# Altium PCB ROS_CAR.PcbDoc (part 8 of 13)
Units mil, origin at the board's own origin, x right, y up, seen from the top; angles counter-clockwise.
Board outline 3937.01 x 3937.01 mil, 2 copper layers (Top Layer, Bottom Layer); 201 components, 155 nets, 998 pads, 0 vias.
Unrouted connection lines stored in the file: 3.
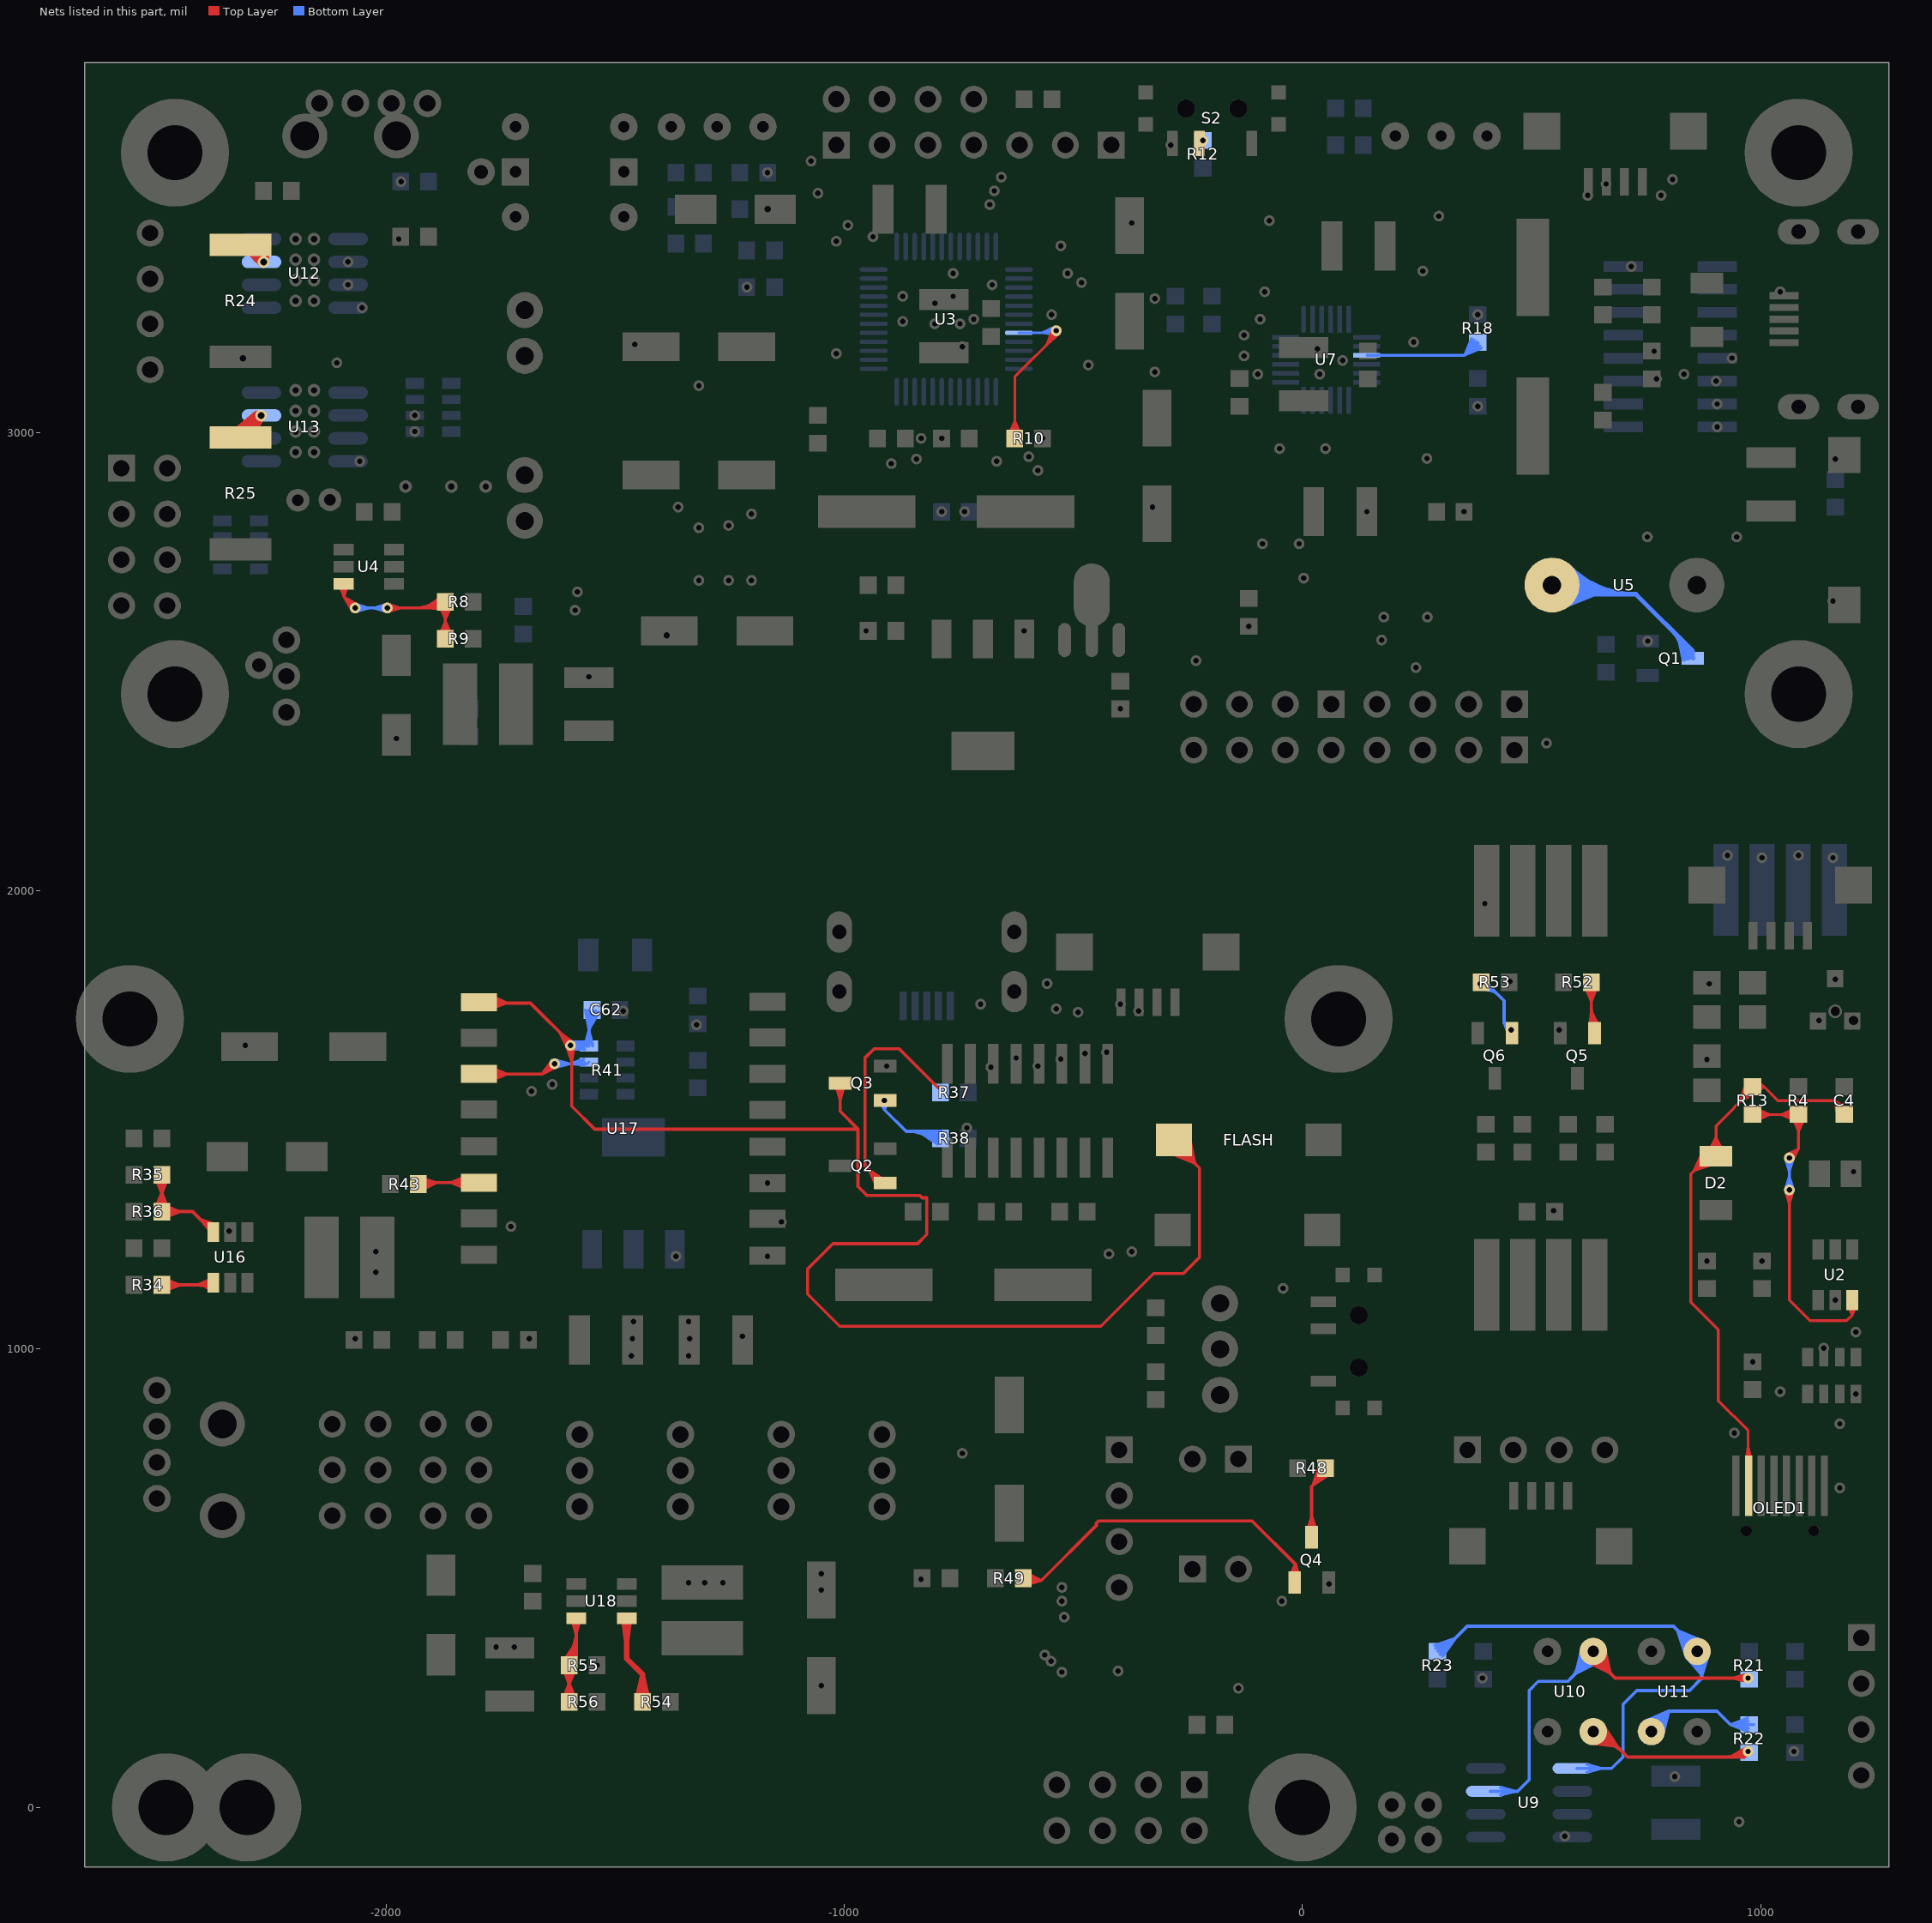
[diagram p8: the nets of this part, all layers, seen from the top]

## Nets (pads, with @x,y where several pads share a name; then routed paths per layer and width w, separated by ;. In a path a pad name is that pad's centre, name@x,y a point inside that pad or via, vN(x,y) a via of type N, cw(c..) or ccw(c..) an arc to the next point about the centre after c; other vN are vias at no path point) (continued)
NetQ1_C: Q1.3 U5.2 | length 5338.2
  Bottom Layer w10: U5.2@537.52,2672.09 562.52,2647.09 727.52,2647.09 851.73,2522.87 Q1.3@851.73,2507.09 ; U5.2@542.5,2642.17 636.62,2647.09 ; U5.2@542.51,2652.22 636.62,2647.09 ; U5.2@543.57,2632.1 636.62,2647.09 ; U5.2@545.74,2622.1 636.62,2647.09 ; U5.2@548.06,2670.62 ccw(c604.88,2727.44) 604.88,2647.09 ccw(c604.88,2606.73) U5.2@576.34,2635.27 ; U5.2@548.86,2681.45 636.62,2647.09 ; U5.2@549.04,2612.27 636.62,2647.09 ; U5.2@553.02,2690.6 636.62,2647.09 ; U5.2@555.13,2677.69 ccw(c629.02,2751.58) 629.02,2647.09 ccw(c629.02,2582.59) U5.2@583.41,2628.2 ; U5.2@558.17,2699.32 636.62,2647.09 ; U5.2@562.2,2684.76 ccw(c653.16,2775.73) 653.16,2647.09 ; U5.2@564.29,2707.51 636.62,2647.09 ; U5.2@569.27,2691.84 ccw(c677.3,2799.87) 677.3,2647.09 ; U5.2@571.37,2715.09 636.62,2647.09 ; U5.2@576.34,2698.91 ccw(c701.44,2824.01) 701.44,2647.09 ; U5.2@583.41,2705.98 ccw(c725.59,2848.15) 725.59,2647.09 ; Q1.3@832.42,2504.85 826.15,2545.91 ; Q1.3@832.47,2504.67 825.31,2545.6 ; Q1.3@848.65,2511.22 825.31,2545.6 ; Q1.3@848.74,2511.06 826.15,2545.91 ; 807.1,2567.51 cw(c746.68,2507.09) Q1.3@832.13,2507.09 ; 807.1,2567.51 cw(c746.68,2507.09) Q1.3@832.13,2507.09 ; 807.1,2567.51 cw(c746.68,2507.09) Q1.3@832.13,2507.09 ; 821.76,2552.85 Q1.3@840.91,2507.09 ; 821.76,2552.85 Q1.3@848.67,2511.18 ; 821.76,2552.85 Q1.3@832.54,2504.43 ; 821.76,2552.85 Q1.3@840.91,2507.09 ; 821.76,2552.85 Q1.3@848.67,2511.18 ; 821.76,2552.85 Q1.3@832.54,2504.43 ; 821.76,2552.85 Q1.3@840.91,2507.09 ; 821.76,2552.85 Q1.3@848.67,2511.18 ; 821.76,2552.85 Q1.3@832.54,2504.43 ; 821.82,2552.56 Q1.3@840.91,2507.09 ; 821.82,2552.56 Q1.3@848.67,2511.19 ; 821.82,2552.56 Q1.3@832.54,2504.42 ; 821.82,2552.58 Q1.3@840.91,2507.09 ; 821.82,2552.58 Q1.3@848.67,2511.19 ; 821.82,2552.58 Q1.3@832.54,2504.42 ; 821.82,2552.58 Q1.3@840.91,2507.09 ; 821.82,2552.58 Q1.3@848.67,2511.19 ; 821.82,2552.58 Q1.3@832.54,2504.42 ; 821.82,2552.58 Q1.3@840.91,2507.09 ; 821.82,2552.58 Q1.3@848.67,2511.19 ; 821.82,2552.58 Q1.3@832.54,2504.42 ; 823.92,2547.56 Q1.3@840.91,2507.09 ; 823.92,2547.56 Q1.3@848.62,2511.28 ; 823.92,2547.56 Q1.3@832.51,2504.52 ; 823.98,2547.54 Q1.3@840.91,2507.09 ; 823.98,2547.54 Q1.3@848.62,2511.27 ; 823.98,2547.54 Q1.3@832.51,2504.53 ; 823.96,2547.58 Q1.3@840.91,2507.09 ; 823.96,2547.58 Q1.3@848.63,2511.27 ; 823.96,2547.58 Q1.3@832.51,2504.52 ; 823.96,2547.58 Q1.3@840.91,2507.09 ; 823.96,2547.58 Q1.3@848.63,2511.27 ; 823.96,2547.58 Q1.3@832.51,2504.52 ; 823.96,2547.58 Q1.3@840.91,2507.09 ; 823.96,2547.58 Q1.3@848.63,2511.27 ; 823.96,2547.58 Q1.3@832.51,2504.52 ; 823.96,2547.58 Q1.3@840.91,2507.09 ; 823.96,2547.58 Q1.3@848.63,2511.27 ; 823.96,2547.58 Q1.3@832.51,2504.52 ; 824.17,2550.44 cw(c780.82,2507.09) Q1.3@842.13,2507.09 ; 824.17,2550.44 cw(c780.82,2507.09) Q1.3@842.13,2507.09 ; 824.17,2550.44 cw(c780.82,2507.09) Q1.3@842.13,2507.09 ; 825.31,2545.6 Q1.3@840.91,2507.09 ; 826.15,2545.91 Q1.3@840.91,2507.09 ; 826.22,2545.94 Q1.3@840.91,2507.09 ; 826.22,2545.94 Q1.3@848.74,2511.04 ; 826.22,2545.94 Q1.3@832.41,2504.87 ; 826.22,2545.94 Q1.3@840.91,2507.09 ; 826.22,2545.94 Q1.3@848.74,2511.04 ; 826.22,2545.94 Q1.3@832.41,2504.87 ; 826.22,2545.94 Q1.3@840.91,2507.09 ; 826.22,2545.94 Q1.3@848.74,2511.04 ; 826.22,2545.94 Q1.3@832.41,2504.87 ; 826.22,2545.94 Q1.3@840.91,2507.09 ; 826.22,2545.94 Q1.3@848.74,2511.04 ; 826.22,2545.94 Q1.3@832.41,2504.87 ; 826.22,2545.94 Q1.3@840.91,2507.09 ; 826.22,2545.94 Q1.3@848.74,2511.04 ; 826.22,2545.94 Q1.3@832.41,2504.87 ; 826.22,2545.94 Q1.3@840.91,2507.09 ; 826.22,2545.94 Q1.3@848.74,2511.04 ; 826.22,2545.94 Q1.3@832.41,2504.87 ; 841.24,2533.37 cw(c814.96,2507.09) Q1.3@852.13,2507.09 ; 841.24,2533.37 cw(c814.96,2507.09) Q1.3@852.13,2507.09 ; 841.24,2533.37 cw(c814.96,2507.09) Q1.3@852.13,2507.09
NetQ2_B: Q2.1 R37.2 | length 2861.7
  Top Layer w7: Q2.1@-910.79,1362.6 -917.6,1362.6 -955,1400 -955,1635 -935,1655 -880,1655 -795,1570 ; -944.27,1389.27 Q2.1@-921.61,1362.6 ; -944.27,1389.27 Q2.1@-914.84,1370.33 ; -944.27,1389.27 Q2.1@-930.34,1357.17 ; -944.27,1389.27 Q2.1@-921.61,1362.6 ; -944.27,1389.27 Q2.1@-914.84,1370.33 ; -944.27,1389.27 Q2.1@-930.34,1357.17 ; -944.27,1389.27 Q2.1@-921.61,1362.6 ; -944.27,1389.27 Q2.1@-914.84,1370.33 ; -944.27,1389.27 Q2.1@-930.34,1357.17 ; -944.27,1389.27 Q2.1@-921.61,1362.6 ; -944.27,1389.27 Q2.1@-914.84,1370.33 ; -944.27,1389.27 Q2.1@-930.34,1357.17 ; -944.27,1389.27 Q2.1@-921.61,1362.6 ; -944.27,1389.27 Q2.1@-914.84,1370.33 ; -944.27,1389.27 Q2.1@-930.34,1357.17 ; -944.27,1389.27 Q2.1@-921.61,1362.6 ; -944.27,1389.27 Q2.1@-914.84,1370.33 ; -944.27,1389.27 Q2.1@-930.34,1357.17 ; -944.27,1389.27 Q2.1@-921.61,1362.6 ; -944.27,1389.27 Q2.1@-914.84,1370.33 ; -944.27,1389.27 Q2.1@-930.34,1357.17 ; -944.27,1389.27 Q2.1@-921.61,1362.6 ; -944.27,1389.27 Q2.1@-914.84,1370.33 ; -944.27,1389.27 Q2.1@-930.34,1357.17 ; -944.27,1389.27 Q2.1@-921.61,1362.6 ; -944.27,1389.27 Q2.1@-914.84,1370.33 ; -944.27,1389.27 Q2.1@-930.34,1357.17 ; -944.27,1389.27 Q2.1@-921.61,1362.6 ; -944.27,1389.27 Q2.1@-914.84,1370.33 ; -944.27,1389.27 Q2.1@-930.34,1357.17 ; -944.27,1389.27 Q2.1@-921.61,1362.6 ; -944.27,1389.27 Q2.1@-914.84,1370.33 ; -944.27,1389.27 Q2.1@-930.34,1357.17 ; -944.27,1389.27 Q2.1@-921.61,1362.6 ; -944.27,1389.27 Q2.1@-914.84,1370.33 ; -944.27,1389.27 Q2.1@-930.34,1357.17 ; -944.27,1389.27 Q2.1@-921.61,1362.6 ; -944.27,1389.27 Q2.1@-914.84,1370.33 ; -944.27,1389.27 Q2.1@-930.34,1357.17 ; -944.27,1389.27 Q2.1@-921.61,1362.6 ; -944.27,1389.27 Q2.1@-914.84,1370.33 ; -944.27,1389.27 Q2.1@-930.34,1357.17 ; -944.27,1389.27 Q2.1@-921.61,1362.6 ; -944.27,1389.27 Q2.1@-914.84,1370.33 ; -944.27,1389.27 Q2.1@-930.34,1357.17 ; -944.27,1389.27 Q2.1@-921.61,1362.6 ; -944.27,1389.27 Q2.1@-914.84,1370.33 ; -944.27,1389.27 Q2.1@-930.34,1357.17 ; -944.27,1389.27 Q2.1@-921.61,1362.6 ; -944.27,1389.27 Q2.1@-914.84,1370.33 ; -944.27,1389.27 Q2.1@-930.34,1357.17 ; -944.27,1389.27 Q2.1@-921.61,1362.6 ; -944.27,1389.27 Q2.1@-914.84,1370.33 ; -944.27,1389.27 Q2.1@-930.34,1357.17 ; -944.27,1389.27 Q2.1@-921.61,1362.6 ; -944.27,1389.27 Q2.1@-914.84,1370.33 ; -944.27,1389.27 Q2.1@-930.34,1357.17 ; -944.27,1389.27 Q2.1@-921.61,1362.6 ; -944.27,1389.27 Q2.1@-914.84,1370.33 ; -944.27,1389.27 Q2.1@-930.34,1357.17 ; -944.27,1389.27 Q2.1@-921.61,1362.6 ; -944.27,1389.27 Q2.1@-914.84,1370.33 ; -944.27,1389.27 Q2.1@-930.34,1357.17 ; -942,1387 cw(c-966.41,1362.6) Q2.1@-931.89,1362.6 ; -942,1387 cw(c-966.41,1362.6) Q2.1@-931.89,1362.6 ; -942,1387 cw(c-966.41,1362.6) Q2.1@-931.89,1362.6 ; -932.31,1377.31 ccw(c-921.61,1388) Q2.1@-921.61,1372.88 ; -932.31,1377.31 ccw(c-921.61,1388) Q2.1@-921.61,1372.88 ; -932.31,1377.31 ccw(c-921.61,1388) Q2.1@-921.61,1372.88 ; Q2.1@-930.05,1375.05 cw(c-942.51,1362.6) Q2.1@-924.89,1362.6 ; Q2.1@-930.05,1375.05 cw(c-942.51,1362.6) Q2.1@-924.89,1362.6 ; Q2.1@-930.05,1375.05 cw(c-942.51,1362.6) Q2.1@-924.89,1362.6
NetQ3_B: pad.1@-912.5,1542.5 Q3.1 R38.2 | length 691.5
  Bottom Layer w7: pad.1@-920.63,1540.77 -912.5,1522.5 ; pad.1@-918.36,1536.61 cw(c-932.41,1522.5) -912.5,1522.5 ; pad.1@-906.64,1536.61 ccw(c-892.59,1522.5) -912.5,1522.5 ; pad.1@-904.37,1540.77 -912.5,1522.5 ; -859.9,1475 cw(c-859.9,1391.4) R38.2@-800.79,1450.51 ; -843,1475 cw(c-843,1408.3) R38.2@-795.84,1455.46 ; -826.1,1475 cw(c-826.1,1425.2) R38.2@-790.89,1460.41 ; -809.2,1475 cw(c-809.2,1442.1) R38.2@-785.94,1465.36 ; R38.2@-796.55,1447.55 -838.11,1475 ; R38.2@-793.09,1453.69 -838.11,1475 ; R38.2@-790.32,1460 -805.32,1475 -865,1475 -912.5,1522.5 ; R38.2@-790.32,1460.98 -838.11,1475 ; R38.2@-788.71,1468.62 -838.11,1475 ; R38.2@-788.31,1475.65 -838.11,1475 ; -912.5,1522.5 pad.1@-912.5,1542.5 -912.5,1522.5
NetQ4_B: Q4.1 R49.1 | length 2905
  Top Layer w7: R49.1@-610,495 -570,495 ; R49.1@-609.71,491.21 -570.18,495 ; R49.1@-609.69,499.02 -570.18,495 ; R49.1@-608.41,484.26 -570.18,495 ; R49.1@-608.14,506.67 -570.18,495 ; R49.1@-605.47,513.21 -570.18,495 ; R49.1@-603.64,503.96 ccw(c-584.76,519.38) -584.76,495 ; R49.1@-599.21,488.55 cw(c-583.63,472.96) -583.63,495 ; R49.1@-598.22,508.38 ccw(c-570,531.43) -570,495 ; Q4.1@-17.4,490.79 -15,493.19 -15,530 ; -570,495 -450,615 -450,620 -445,625 -110,625 -15,530 ; Q4.1@-27.32,504.31 -15,530 ; Q4.1@-27.32,504.31 -15,530 ; Q4.1@-27.32,504.31 -15,530 ; Q4.1@-27.32,504.31 -15,530 ; Q4.1@-27.32,504.31 -15,530 ; Q4.1@-27.32,504.31 -15,530 ; Q4.1@-27.32,504.31 -15,530 ; Q4.1@-27.32,504.31 -15,530 ; Q4.1@-27.32,504.31 -15,530 ; Q4.1@-27.32,504.31 -15,530 ; Q4.1@-27.32,504.31 -15,530 ; Q4.1@-27.32,504.31 -15,530 ; Q4.1@-27.32,504.31 -15,530 ; Q4.1@-27.32,504.31 -15,530 ; Q4.1@-27.32,504.31 -15,530 ; Q4.1@-27.32,504.31 -15,530 ; Q4.1@-27.32,504.31 -15,530 ; Q4.1@-27.32,504.31 -15,530 ; Q4.1@-27.32,504.31 -15,530 ; Q4.1@-27.32,504.31 -15,530 ; Q4.1@-27.32,504.31 -15,530 ; Q4.1@-24.26,509.27 ccw(c-42.83,530) -15,530 ; Q4.1@-24.26,509.27 ccw(c-42.83,530) -15,530 ; Q4.1@-24.26,509.27 ccw(c-42.83,530) -15,530 ; Q4.1@-17.4,501.61 -15,530 ; Q4.1@-17.4,501.61 -15,530 ; Q4.1@-17.4,501.61 -15,530 ; Q4.1@-17.4,501.61 -15,530 ; Q4.1@-17.4,501.61 -15,530 ; Q4.1@-17.4,501.61 -15,530 ; Q4.1@-17.4,501.61 -15,530 ; Q4.1@-17.4,501.61 -15,530 ; Q4.1@-17.4,501.61 -15,530 ; Q4.1@-17.4,501.61 -15,530 ; Q4.1@-17.4,501.61 -15,530 ; Q4.1@-17.4,501.61 -15,530 ; Q4.1@-17.4,501.61 -15,530 ; Q4.1@-17.4,501.61 -15,530 ; Q4.1@-17.4,501.61 -15,530 ; Q4.1@-17.4,501.61 -15,530 ; Q4.1@-17.4,501.61 -15,530 ; Q4.1@-17.4,501.61 -15,530 ; Q4.1@-17.4,501.61 -15,530 ; Q4.1@-17.4,501.61 -15,530 ; Q4.1@-17.4,501.61 -15,530 ; -15,520.63 ccw(c1.62,520.63) Q4.1@-10.13,508.88 ; -15,520.63 ccw(c1.62,520.63) Q4.1@-10.13,508.88 ; -15,520.63 ccw(c1.62,520.63) Q4.1@-10.13,508.88 ; -15,530 Q4.1@-7.17,502.61 ; -15,530 Q4.1@-7.17,502.61 ; -15,530 Q4.1@-7.17,502.61 ; -15,530 Q4.1@-7.17,502.61 ; -15,530 Q4.1@-7.17,502.61 ; -15,530 Q4.1@-7.17,502.61 ; -15,530 Q4.1@-7.17,502.61 ; -15,530 Q4.1@-7.17,502.61 ; -15,530 Q4.1@-7.17,502.61 ; -15,530 Q4.1@-7.17,502.61 ; -15,530 Q4.1@-7.17,502.61 ; -15,530 Q4.1@-7.17,502.61 ; -15,530 Q4.1@-7.17,502.61 ; -15,530 Q4.1@-7.17,502.61 ; -15,530 Q4.1@-7.17,502.61 ; -15,530 Q4.1@-7.17,502.61 ; -15,530 Q4.1@-7.17,502.61 ; -15,530 Q4.1@-7.17,502.61 ; -15,530 Q4.1@-7.17,502.61 ; -15,530 Q4.1@-7.17,502.61 ; -15,530 Q4.1@-7.17,502.61
NetQ4_C: Q4.3 R48.2 | length 2773.3
  Top Layer w7: Q4.3@20,589.21 20,700 R48.2@60,740 ; 24.35,704.35 ccw(c-3.59,732.29) R48.2@35.62,737.18 ; 34.48,714.48 ccw(c14.41,734.54) R48.2@42.57,738.05 ; R48.2@37.2,745.88 23.21,703.21 ; 39.89,719.89 cw(c50.32,709.47) R48.2@50.32,724.21 ; R48.2@43.7,743.17 23.21,703.21 ; R48.2@50.32,739.02 23.21,703.21 ; R48.2@56.11,733.78 23.21,703.21 ; R48.2@60.49,728.25 23.21,703.21 ; Q4.3@9.83,601.56 20,634.82 ; Q4.3@9.83,601.56 20,634.82 ; Q4.3@9.83,601.56 20,634.82 ; Q4.3@9.83,601.56 20,634.82 ; Q4.3@9.83,601.56 20,634.82 ; Q4.3@9.83,601.56 20,634.82 ; Q4.3@9.83,601.56 20,634.82 ; Q4.3@9.83,601.56 20,634.82 ; Q4.3@9.83,601.56 20,634.82 ; Q4.3@9.83,601.56 20,634.82 ; Q4.3@9.83,601.56 20,634.82 ; Q4.3@9.83,601.56 20,634.82 ; Q4.3@9.83,601.56 20,634.82 ; Q4.3@9.83,601.56 20,634.82 ; Q4.3@9.83,601.56 20,634.82 ; Q4.3@9.83,601.56 20,634.82 ; Q4.3@9.83,601.56 20,634.82 ; Q4.3@9.83,601.56 20,634.82 ; Q4.3@9.83,601.56 20,634.82 ; Q4.3@9.83,601.56 20,634.82 ; Q4.3@9.83,601.56 20,634.82 ; Q4.3@12.73,607.31 ccw(c-4.82,624.86) 20,624.86 ; Q4.3@12.73,607.31 ccw(c-4.82,624.86) 20,624.86 ; Q4.3@12.73,607.31 ccw(c-4.82,624.86) 20,624.86 ; Q4.3@20,600.04 20,634.82 ; Q4.3@20,600.04 20,634.82 ; Q4.3@20,600.04 20,634.82 ; Q4.3@20,600.04 20,634.82 ; Q4.3@20,600.04 20,634.82 ; Q4.3@20,600.04 20,634.82 ; Q4.3@20,600.04 20,634.82 ; Q4.3@20,600.04 20,634.82 ; Q4.3@20,600.04 20,634.82 ; Q4.3@20,600.04 20,634.82 ; Q4.3@20,600.04 20,634.82 ; Q4.3@20,600.04 20,634.82 ; Q4.3@20,600.04 20,634.82 ; Q4.3@20,600.04 20,634.82 ; Q4.3@20,600.04 20,634.82 ; Q4.3@20,600.04 20,634.82 ; Q4.3@20,600.04 20,634.82 ; Q4.3@20,600.04 20,634.82 ; Q4.3@20,600.04 20,634.82 ; Q4.3@20,600.04 20,634.82 ; Q4.3@20,600.04 20,634.82 ; 20,624.86 ccw(c44.82,624.86) Q4.3@27.27,607.31 ; 20,624.86 ccw(c44.82,624.86) Q4.3@27.27,607.31 ; 20,624.86 ccw(c44.82,624.86) Q4.3@27.27,607.31 ; 20,634.82 Q4.3@30.17,601.56 ; 20,634.82 Q4.3@30.17,601.56 ; 20,634.82 Q4.3@30.17,601.56 ; 20,634.82 Q4.3@30.17,601.56 ; 20,634.82 Q4.3@30.17,601.56 ; 20,634.82 Q4.3@30.17,601.56 ; 20,634.82 Q4.3@30.17,601.56 ; 20,634.82 Q4.3@30.17,601.56 ; 20,634.82 Q4.3@30.17,601.56 ; 20,634.82 Q4.3@30.17,601.56 ; 20,634.82 Q4.3@30.17,601.56 ; 20,634.82 Q4.3@30.17,601.56 ; 20,634.82 Q4.3@30.17,601.56 ; 20,634.82 Q4.3@30.17,601.56 ; 20,634.82 Q4.3@30.17,601.56 ; 20,634.82 Q4.3@30.17,601.56 ; 20,634.82 Q4.3@30.17,601.56 ; 20,634.82 Q4.3@30.17,601.56 ; 20,634.82 Q4.3@30.17,601.56 ; 20,634.82 Q4.3@30.17,601.56 ; 20,634.82 Q4.3@30.17,601.56
NetQ5_B: Q5.1 R52.1 | length 2850.5
  Top Layer w7: R52.1@615.77,1796.23 630.31,1759.71 ; R52.1@619.84,1788.55 cw(c594.57,1763.27) 630.31,1763.27 cw(c666.06,1763.27) R52.1@640.79,1788.55 ; R52.1@622.55,1798.24 630.31,1759.71 ; R52.1@624.79,1793.5 cw(c611.47,1780.17) 630.31,1780.17 cw(c649.16,1780.17) R52.1@635.84,1793.5 ; R52.1@630.31,1799.02 630.31,1759.71 ; R52.1@630.31,1800 630.31,1696.3 Q5.1@637.4,1689.21 ; R52.1@638.08,1798.24 630.31,1759.71 ; R52.1@644.86,1796.23 630.31,1759.71 ; Q5.1@627.14,1699.48 630.31,1735.67 ; Q5.1@627.14,1699.48 630.31,1735.67 ; Q5.1@627.14,1699.48 630.31,1735.67 ; Q5.1@627.14,1699.48 630.31,1735.67 ; Q5.1@627.14,1699.48 630.31,1735.67 ; Q5.1@627.14,1699.48 630.31,1735.67 ; Q5.1@627.14,1699.48 630.31,1735.67 ; Q5.1@627.14,1699.48 630.31,1735.67 ; Q5.1@627.14,1699.48 630.31,1735.67 ; Q5.1@627.14,1699.48 630.31,1735.67 ; Q5.1@627.14,1699.48 630.31,1735.67 ; Q5.1@627.14,1699.48 630.31,1735.67 ; Q5.1@627.14,1699.48 630.31,1735.67 ; Q5.1@627.13,1699.52 630.52,1734.64 ; Q5.1@627.13,1699.52 630.52,1734.64 ; Q5.1@627.13,1699.52 630.52,1734.64 ; Q5.1@627.13,1699.52 630.52,1734.64 ; Q5.1@627.13,1699.52 630.52,1734.64 ; Q5.1@627.13,1699.52 630.52,1734.64 ; Q5.1@627.13,1699.52 630.52,1734.64 ; Q5.1@627.13,1699.52 630.52,1734.64 ; 630.31,1725.07 ccw(c662.43,1725.07) Q5.1@639.72,1702.36 ; 630.31,1725.07 ccw(c662.43,1725.07) Q5.1@639.72,1702.36 ; 630.31,1725.07 ccw(c662.43,1725.07) Q5.1@639.72,1702.36 ; 630.31,1735.67 Q5.1@637.4,1700.04 ; 630.31,1735.67 Q5.1@647.1,1703.45 ; 630.31,1735.67 Q5.1@637.4,1700.04 ; 630.31,1735.67 Q5.1@647.1,1703.45 ; 630.31,1735.67 Q5.1@637.4,1700.04 ; 630.31,1735.67 Q5.1@647.1,1703.45 ; 630.31,1735.67 Q5.1@637.4,1700.04 ; 630.31,1735.67 Q5.1@647.1,1703.45 ; 630.31,1735.67 Q5.1@637.4,1700.04 ; 630.31,1735.67 Q5.1@647.1,1703.45 ; 630.31,1735.67 Q5.1@637.4,1700.04 ; 630.31,1735.67 Q5.1@647.1,1703.45 ; 630.31,1735.67 Q5.1@637.4,1700.04 ; 630.31,1735.67 Q5.1@647.1,1703.45 ; 630.31,1735.67 Q5.1@637.4,1700.04 ; 630.31,1735.67 Q5.1@647.1,1703.45 ; 630.31,1735.67 Q5.1@637.4,1700.04 ; 630.31,1735.67 Q5.1@647.1,1703.45 ; 630.31,1735.67 Q5.1@637.4,1700.04 ; 630.31,1735.67 Q5.1@647.1,1703.45 ; 630.31,1735.67 Q5.1@637.4,1700.04 ; 630.31,1735.67 Q5.1@647.1,1703.45 ; 630.31,1735.67 Q5.1@637.4,1700.04 ; 630.31,1735.67 Q5.1@647.1,1703.45 ; 630.31,1735.67 Q5.1@637.4,1700.04 ; 630.31,1735.67 Q5.1@647.1,1703.45 ; 630.31,1741.96 ccw(c679.33,1741.96) Q5.1@644.67,1707.31 ; 630.31,1741.96 ccw(c679.33,1741.96) Q5.1@644.67,1707.31 ; 630.31,1741.96 ccw(c679.33,1741.96) Q5.1@644.67,1707.31 ; 630.52,1734.64 Q5.1@637.4,1700.04 ; 630.52,1734.64 Q5.1@647.08,1703.49 ; 630.52,1734.64 Q5.1@637.4,1700.04 ; 630.52,1734.64 Q5.1@647.08,1703.49 ; 630.52,1734.64 Q5.1@637.4,1700.04 ; 630.52,1734.64 Q5.1@647.08,1703.49 ; 630.52,1734.64 Q5.1@637.4,1700.04 ; 630.52,1734.64 Q5.1@647.08,1703.49 ; 630.52,1734.64 Q5.1@637.4,1700.04 ; 630.52,1734.64 Q5.1@647.08,1703.49 ; 630.52,1734.64 Q5.1@637.4,1700.04 ; 630.52,1734.64 Q5.1@647.08,1703.49 ; 630.52,1734.64 Q5.1@637.4,1700.04 ; 630.52,1734.64 Q5.1@647.08,1703.49 ; 630.52,1734.64 Q5.1@637.4,1700.04 ; 630.52,1734.64 Q5.1@647.08,1703.49
NetQ6_B: pad.1@387.83,1797.09 pad.1@455.24,1696.3 Q6.1 R53.1 | length 572.9
  Bottom Layer w7: pad.1@384.65,1789.41 421.27,1778.73 ; pad.1@387.83,1788.78 cw(c387.83,1732.31) 427.76,1772.24 ; pad.1@387.83,1795.78 cw(c387.83,1756.21) 415.81,1784.19 ; pad.1@387.83,1802.78 cw(c387.83,1780.11) 403.86,1796.14 ; pad.1@388.65,1796.06 cw(c396.24,1786.46) 404.89,1795.11 ; pad.1@392.6,1803.89 421.27,1778.73 ; pad.1@392.99,1790.57 cw(c401.15,1780.24) 410.45,1789.55 ; pad.1@394.86,1792.65 cw(c402.91,1787.56) 402.91,1797.09 ; pad.1@394.86,1801.52 ccw(c402.91,1806.61) 402.91,1797.09 ; pad.1@446.93,1696.3 ccw(c426.86,1696.3) 441.05,1710.49 ccw(c455.24,1724.67) pad.1@455.24,1704.61 ; pad.1@448.34,1691.67 440,1711.54 ; pad.1@459.87,1703.2 440,1711.54 ; pad.1@387.83,1797.09 402.91,1797.09 ; pad.1@387.83,1797.09 421.27,1778.73 ; pad.1@387.83,1797.09 402.91,1797.09 ; 402.91,1797.09 390.12,1789.1 402.91,1797.09 ; 402.91,1797.09 390.12,1805.08 402.91,1797.09 ; 402.91,1797.09 440,1760 440,1711.54 ; 440,1711.54 pad.1@455.24,1696.3 440,1711.54
NetR4_1: pad.1@1062.52,1347.09 pad.1@1062.52,1417.09 R4.1 R13.2 U2.3 | length 2303.2
  Top Layer w6: R13.2@982.52,1511.77 R4.1@1082.52,1511.77 ; R13.2@983.5,1511.77 1019.81,1511.77 ; R13.2@983.65,1508.47 1019.81,1511.77 ; R13.2@983.65,1515.08 1019.81,1511.77 ; R13.2@984.7,1502.54 1019.81,1511.77 ; R13.2@984.7,1521 1019.81,1511.77 ; R13.2@986.73,1496.81 1019.81,1511.77 ; R13.2@986.73,1526.73 1019.81,1511.77 ; R13.2@990.09,1505.19 cw(c1005.97,1489.3) 1005.97,1511.77 cw(c1005.97,1534.24) R13.2@990.09,1518.35 ; R13.2@994.33,1500.95 cw(c1020.46,1474.82) 1020.46,1511.77 cw(c1020.46,1548.73) R13.2@994.33,1522.6 ; pad.1@1053.81,1345.78 1062.52,1317.28 ; pad.1@1056.29,1340.86 cw(c1041.25,1325.82) 1062.52,1325.82 cw(c1083.79,1325.82) pad.1@1068.75,1340.86 ; pad.1@1057.34,1424.21 1082.52,1437.09 ; pad.1@1062.52,1417.09 1082.52,1437.09 ; pad.1@1062.52,1425.9 ccw(c1062.52,1447.17) 1077.56,1432.13 ccw(c1092.6,1417.09) pad.1@1071.33,1417.09 ; R4.1@1067.56,1508.55 1082.52,1475.46 ; pad.1@1069.64,1411.9 1082.52,1437.09 ; R4.1@1070.71,1500.95 ccw(c1044.58,1474.82) 1044.58,1511.77 ccw(c1044.58,1548.73) R4.1@1070.71,1522.6 ; pad.1@1071.23,1345.78 1062.52,1317.28 ; R4.1@1071.7,1500.95 cw(c1045.57,1474.82) 1082.52,1474.82 cw(c1119.47,1474.82) R4.1@1093.34,1500.95 ; R4.1@1073.29,1510.58 1082.52,1475.46 ; R4.1@1074.95,1505.19 ccw(c1059.07,1489.3) 1059.07,1511.77 ccw(c1059.07,1534.24) R4.1@1074.95,1518.35 ; R4.1@1075.94,1505.19 cw(c1060.05,1489.3) 1082.52,1489.3 cw(c1104.99,1489.3) R4.1@1089.1,1505.19 ; R4.1@1078.31,1496.81 1045.23,1511.77 ; R4.1@1078.31,1526.73 1045.23,1511.77 ; R4.1@1079.22,1511.62 1082.52,1475.46 ; R4.1@1080.34,1502.54 1045.23,1511.77 ; R4.1@1080.34,1521 1045.23,1511.77 ; R4.1@1081.38,1508.47 1045.23,1511.77 ; R4.1@1081.38,1515.08 1045.23,1511.77 ; R4.1@1081.54,1511.77 1045.23,1511.77 ; R4.1@1085.82,1511.62 1082.52,1475.46 ; R4.1@1091.75,1510.58 1082.52,1475.46 ; R4.1@1097.48,1508.54 1082.52,1475.46 ; U2.3@1190.34,1096.08 1199.92,1074.49 ; U2.3@1193,1091.18 cw(c1176.34,1074.49) 1199.92,1074.49 ; U2.3@1196.14,1097.81 1199.92,1074.49 ; U2.3@1199.92,1098.11 1199.92,1074.49 ; U2.3@1199.92,1106.97 1199.92,1074.49 ; U2.3@1203.7,1097.81 1199.92,1074.49 ; U2.3@1206.84,1091.18 ccw(c1223.5,1074.49) 1199.92,1074.49 ; U2.3@1209.5,1096.08 1199.92,1074.49 ; 1062.52,1317.28 pad.1@1062.52,1347.09 1062.52,1107.09 1107.52,1062.09 1187.52,1062.09 1199.92,1074.49 ; 1082.52,1437.09 R4.1@1082.52,1511.77 ; 1082.52,1475.46 R4.1@1082.52,1511.77
  Bottom Layer w6: pad.1@1053.81,1348.39 1062.52,1376.9 pad.1@1071.23,1348.39 ; pad.1@1053.81,1415.78 1062.52,1387.28 pad.1@1071.23,1415.78 ; pad.1@1056.29,1353.32 ccw(c1041.25,1368.36) 1062.52,1368.36 ccw(c1083.79,1368.36) pad.1@1068.75,1353.32 ; pad.1@1056.29,1410.86 cw(c1041.25,1395.82) 1062.52,1395.82 cw(c1083.79,1395.82) pad.1@1068.75,1410.86 ; pad.1@1062.52,1347.09 pad.1@1062.52,1417.09
NetR8_1: pad.1@-1997.48,2617.09 pad.1@-2067.48,2617.09 R8.1 R9.2 U4.3 | length 2122.5
  Top Layer w6: U4.3@-2102.24,2667.94 -2092.6,2642.2 ; U4.3@-2099.52,2662.76 cw(c-2116.25,2646.04) -2092.6,2646.04 cw(c-2068.95,2646.04) U4.3@-2085.67,2662.76 ; U4.3@-2096.38,2669.42 -2092.6,2642.2 ; U4.3@-2088.81,2669.42 -2092.6,2642.2 ; U4.3@-2082.96,2667.94 -2092.6,2642.2 ; pad.1@-2076.29,2617.09 ccw(c-2097.56,2617.09) -2082.52,2632.13 ccw(c-2067.48,2647.17) pad.1@-2067.48,2625.9 ; pad.1@-2074.45,2611.7 -2092.02,2641.63 ; pad.1@-2062.09,2624.06 -2092.02,2641.63 ; pad.1@-1997.48,2617.09 -1883.78,2617.09 R8.1@-1870.79,2630.08 R9.2@-1870.79,2550.08 ; pad.1@-1996.18,2608.37 -1967.67,2617.09 pad.1@-1996.18,2625.8 ; pad.1@-1991.25,2610.86 cw(c-1976.21,2595.82) -1976.21,2617.09 cw(c-1976.21,2638.36) pad.1@-1991.25,2623.32 ; -1936.73,2617.09 ccw(c-1936.73,2695.04) R8.1@-1881.61,2639.92 ; -1922.25,2617.09 ccw(c-1922.25,2680.55) R8.1@-1877.37,2635.68 ; -1907.76,2617.09 ccw(c-1907.76,2666.07) R8.1@-1873.13,2631.43 ; -1893.28,2617.09 ccw(c-1893.28,2651.58) R8.1@-1868.88,2627.19 ; R9.2@-1885.75,2554.29 -1870.79,2587.37 ; R8.1@-1885.75,2625.87 -1870.79,2592.79 ; R9.2@-1881.61,2561.89 ccw(c-1907.74,2588.02) -1870.79,2588.02 ccw(c-1833.83,2588.02) R9.2@-1859.96,2561.89 ; R8.1@-1881.61,2618.27 cw(c-1907.74,2592.14) -1870.79,2592.14 cw(c-1833.83,2592.14) R8.1@-1859.96,2618.27 ; R9.2@-1880.02,2552.26 -1870.79,2587.37 ; R8.1@-1880.02,2627.9 -1870.79,2592.79 ; R9.2@-1877.37,2557.64 ccw(c-1893.26,2573.53) -1870.79,2573.53 ccw(c-1848.32,2573.53) R9.2@-1864.21,2557.64 ; R8.1@-1877.37,2622.51 cw(c-1893.26,2606.63) -1870.79,2606.63 cw(c-1848.32,2606.62) R8.1@-1864.21,2622.51 ; R8.1@-1877.33,2642.93 -1914.1,2617.09 ; R8.1@-1874.19,2637.76 -1914.1,2617.09 ; R9.2@-1874.09,2551.21 -1870.79,2587.37 ; R8.1@-1874.09,2628.94 -1870.79,2592.79 ; R8.1@-1871.79,2632.25 -1914.1,2617.09 ; R9.2@-1870.79,2551.06 -1870.79,2587.37 ; R8.1@-1870.02,2625.88 -1914.1,2617.09 ; R8.1@-1869.27,2613.86 -1914.1,2617.09 ; R8.1@-1869.24,2619.92 -1914.1,2617.09 ; R9.2@-1867.48,2551.21 -1870.79,2587.37 ; R8.1@-1867.48,2628.94 -1870.79,2592.79 ; R9.2@-1861.56,2552.26 -1870.79,2587.37 ; R8.1@-1861.56,2627.9 -1870.79,2592.79 ; R9.2@-1855.82,2554.29 -1870.79,2587.37 ; R8.1@-1855.82,2625.87 -1870.79,2592.79 ; -2092.6,2642.2 U4.3@-2092.6,2669.69 -2092.6,2642.2 ; -2092.6,2642.2 pad.1@-2067.48,2617.09 -2092.02,2641.63 ; -1914.1,2617.09 -1870.79,2629.09 -1870.79,2592.79
  Bottom Layer w6: pad.1@-2067.48,2617.09 pad.1@-1997.48,2617.09 ; pad.1@-2066.18,2608.37 -2037.67,2617.09 pad.1@-2066.18,2625.8 ; pad.1@-2061.25,2610.86 cw(c-2046.21,2595.82) -2046.21,2617.09 cw(c-2046.21,2638.36) pad.1@-2061.25,2623.32 ; pad.1@-2003.71,2610.86 ccw(c-2018.75,2595.82) -2018.75,2617.09 ccw(c-2018.75,2638.36) pad.1@-2003.71,2623.32 ; pad.1@-1998.78,2608.37 -2027.29,2617.09 pad.1@-1998.78,2625.8
NetR10_2: pad.1@-537.48,3222.09 R10.2 U3.44 | length 1037.4
  Top Layer w6: R10.2@-642.73,2991.43 -627.48,3024.38 ; R10.2@-638.62,2998.89 ccw(c-665.51,3025.79) -627.48,3025.79 ; R10.2@-637.02,2989.34 -627.48,3024.38 ; R10.2@-634.38,2994.65 ccw(c-651.03,3011.3) -627.48,3011.3 ; R10.2@-631.1,2988.25 -627.48,3024.38 ; R10.2@-627.8,2988.07 -627.48,3024.38 ; R10.2@-627.48,2977.09 -627.48,3122.09 pad.1@-534.98,3214.59 ; -627.48,3009.78 ccw(c-606.09,3009.78) R10.2@-621.21,2994.65 ; -627.48,3024.26 ccw(c-591.6,3024.26) R10.2@-616.97,2998.89 ; R10.2@-624.49,2988.19 -627.48,3024.38 ; R10.2@-618.56,2989.18 -627.48,3024.38 ; R10.2@-612.8,2991.17 -627.48,3024.38 ; -559.59,3189.97 ccw(c-591.71,3222.09) pad.1@-546.29,3222.09 ; -549.35,3200.22 ccw(c-571.22,3222.09) pad.1@-540.29,3222.09 ; pad.1@-545.35,3226.04 -557.48,3192.09 ; pad.1@-537.48,3222.09 -557.48,3192.09 ; pad.1@-530.8,3216.34 -557.48,3192.09
  Bottom Layer w6: U3.44@-619.02,3217.56 -542.01,3217.56 pad.1@-537.48,3222.09 -568.26,3217.56 ; U3.44@-593.43,3217.56 -570.5,3217.56 ; -569.68,3217.56 ccw(c-569.68,3254.29) pad.1@-543.71,3228.32 ; -555.2,3217.56 ccw(c-555.2,3239.8) pad.1@-539.47,3224.07 ; pad.1@-539.98,3230.53 -568.26,3217.56 ; pad.1@-537.45,3213.28 -568.26,3217.56
NetR12_2: pad.1@-217.48,3637.09 R12.2 S2.2
NetR18_1: R18.1 U7.9 | length 646.8
  Bottom Layer w6: U7.9@140.31,3168.35 354.09,3168.35 ; U7.9@164.92,3168.35 187.84,3168.35 ; 354.71,3168.96 ccw(c326.9,3196.77) R18.1@366.23,3196.77 ; 357.08,3171.34 cw(c381.54,3146.89) R18.1@381.54,3181.46 ; R18.1@364.95,3179.2 ccw(c347.38,3196.77) R18.1@372.23,3196.77 ; R18.1@367.33,3181.58 cw(c381.54,3167.37) R18.1@381.54,3187.46 ; R18.1@368.67,3205.07 354.09,3168.35 ; R18.1@374.12,3202.4 354.09,3168.35 ; R18.1@379.06,3198.97 354.09,3168.35 ; R18.1@381.54,3196.77 354.09,3168.35 ; R18.1@382.52,3196.77 354.09,3168.35 ; R18.1@383.82,3194.38 354.09,3168.35 ; R18.1@387.42,3189.56 354.09,3168.35 ; R18.1@390.28,3184.21 354.09,3168.35
NetR21_2: pad.1@972.52,282.09 R21.2 U9.3 U10.4 | length 2611
  Top Layer w7: U10.4@617.83,319.84 671.75,292.85 ; U10.4@621.39,326.02 671.75,292.85 ; U10.4@625.61,331.67 671.75,292.85 ; U10.4@630.43,336.77 671.75,292.85 ; U10.4@634.61,313.85 cw(c634.61,274.88) 662.17,302.44 ; U10.4@634.61,320.85 cw(c634.61,298.77) 650.22,314.39 ; U10.4@639.09,343.54 671.75,292.85 ; U10.4@645.2,346.99 671.75,292.85 ; U10.4@646.98,338.6 ccw(c683.8,333.39) 657.51,307.1 ; U10.4@651.71,349.73 671.75,292.85 ; U10.4@653.91,337.62 ccw(c701.18,330.94) 667.42,297.18 ; U10.4@658.56,351.69 671.75,292.85 ; U10.4@660.85,336.64 ccw(c718.55,328.48) 677.34,287.27 ; pad.1@966.64,276.21 ccw(c952.46,262.02) 952.46,282.09 ccw(c952.46,302.15) pad.1@966.64,287.96 ; pad.1@971.47,273.84 939.71,282.09 ; pad.1@971.47,290.33 939.71,282.09 ; 671.75,292.85 U10.4@634.61,340.35 634.61,330 682.52,282.09 pad.1@972.52,282.09 939.71,282.09
  Bottom Layer w7: U9.3@410.04,35.08 469.53,35.08 494.53,60.08 494.53,255.08 514.53,275.08 579.33,275.08 U10.4@644.61,340.35 ; U9.3@431.54,35.08 464.35,35.08 ; U9.3@432.59,26.83 464.35,35.08 ; U9.3@432.59,43.32 464.35,35.08 ; U9.3@437.41,29.2 cw(c451.6,15.01) 451.6,35.08 cw(c451.6,55.14) U9.3@437.41,40.96 ; 584.33,280.08 ccw(c526.85,337.56) U10.4@608.12,339.67 ; 595.86,291.61 ccw(c549.32,338.14) U10.4@615.11,339.85 ; 606.44,302.19 cw(c634.61,274.02) U10.4@634.61,313.85 ; 607.38,303.13 ccw(c571.79,338.73) U10.4@622.11,340.03 ; U10.4@610.73,351.85 596.94,292.69 ; U10.4@617.56,349.83 596.94,292.69 ; 618.39,314.14 cw(c634.61,297.92) U10.4@634.61,320.85 ; 618.91,314.66 ccw(c594.26,339.31) U10.4@629.11,340.21 ; U10.4@624.05,347.05 596.94,292.69 ; U10.4@630.14,343.57 596.94,292.69 ; U10.4@634.61,340.35 596.94,292.69 ; U10.4@638.76,336.75 596.94,292.69 ; U10.4@643.56,331.64 596.94,292.69 ; U10.4@647.77,325.97 596.94,292.69 ; U10.4@651.31,319.79 596.94,292.69
NetR22_1: pad.1@972.52,122.09 R22.1 U10.2 | length 1447.2
  Top Layer w7: U10.2@625.86,140.34 686.38,133.23 ; U10.2@627.11,147.35 686.38,133.23 ; U10.2@629.14,154.11 686.38,133.23 ; U10.2@631.92,160.55 686.38,133.23 ; U10.2@634.61,145.85 cw(c634.61,51.35) 701.43,118.17 ; U10.2@634.61,152.85 cw(c634.61,75.25) 689.48,130.12 ; U10.2@634.61,159.85 cw(c634.61,99.15) 677.53,142.07 ; U10.2@634.61,166.85 cw(c634.61,123.05) 665.58,154.02 ; U10.2@637.71,169.89 686.38,133.23 ; U10.2@642.25,175.24 686.38,133.23 ; U10.2@647.41,180.06 686.38,133.23 ; U10.2@653.14,184.29 686.38,133.23 ; U10.2@661.11,165.35 ccw(c677.65,165.35) 665.95,153.65 ; 923.47,110.08 ccw(c923.47,171.14) pad.1@966.64,127.96 ; 940.36,110.08 ccw(c940.36,154.24) pad.1@971.59,123.01 ; 957.26,110.08 ccw(c957.26,137.34) pad.1@976.54,118.06 ; pad.1@969.16,129.69 935.06,110.08 ; pad.1@969.53,115.08 964.53,110.08 ; pad.1@974.21,113.95 935.06,110.08 ; 686.38,133.23 U10.2@634.61,165.35 654.25,165.35 709.53,110.08 964.53,110.08 ; 935.06,110.08 pad.1@972.52,122.09 ; 964.53,110.08 pad.1@972.52,122.09 ; 964.53,110.08 964.57,124.5 964.53,110.08 ; 964.53,110.08 977.82,115.68 964.53,110.08 ; 964.53,110.08 pad.1@972.52,122.09
NetR22_2: R22.2 U11.1 | length 1230.8
  Bottom Layer w7: U11.1@745.61,186.65 799.53,210.08 ; U11.1@748.85,180.29 799.53,210.08 ; U11.1@752.78,174.43 799.53,210.08 ; U11.1@757.37,169.12 799.53,210.08 ; U11.1@761.38,165.35 799.53,210.08 ; U11.1@761.38,184.85 ccw(c761.38,216.06) 783.44,193.99 ; U11.1@761.38,191.85 ccw(c761.38,239.96) 795.39,205.94 ; U11.1@765.72,161.98 799.53,210.08 ; U11.1@771.38,165.35 771.38,181.93 799.53,210.08 ; U11.1@771.7,158.3 799.53,210.08 ; U11.1@773.65,167.74 cw(c799.58,172.77) 780.9,191.45 ; U11.1@778.11,155.34 799.53,210.08 ; U11.1@780.52,169.07 cw(c815.18,175.8) 790.21,200.77 ; U11.1@784.9,153.14 799.53,210.08 ; U11.1@787.39,170.41 cw(c830.77,178.83) 799.53,210.08 ; R22.2@963.07,169.92 ccw(c937.8,144.65) 937.8,180.39 ccw(c937.8,216.14) R22.2@963.07,190.86 ; R22.2@968.02,174.87 ccw(c954.7,161.55) 954.7,180.39 ccw(c954.7,199.24) R22.2@968.02,185.91 ; R22.2@970.75,165.85 934.24,180.39 ; R22.2@970.75,194.94 934.24,180.39 ; R22.2@972.77,172.63 934.24,180.39 ; R22.2@972.77,188.16 934.24,180.39 ; R22.2@973.54,180.39 934.24,180.39 ; R22.2@984.53,180.39 934.21,180.39 ; 799.53,210.08 904.53,210.08 934.21,180.39
NetR23_2: R23.2 U9.5 U11.4 | length 2935.3
  Bottom Layer w7: R23.2@288.62,353.5 332.81,368.36 ; R23.2@291.37,347.01 332.81,368.36 ; R23.2@295.51,340.39 332.81,368.36 ; R23.2@295.51,341.2 ccw(c295.51,365.68) R23.2@312.82,348.37 ; R23.2@295.51,348.2 ccw(c295.51,389.58) 324.77,360.32 ; R23.2@295.51,355.2 ccw(c295.51,413.48) 336.72,372.27 ; R23.2@300.7,334.56 332.81,368.36 ; R23.2@304.53,340.39 304.84,340.39 359.53,395.08 809.53,395.08 864.25,340.35 871.38,340.35 871.38,281.93 844.53,255.08 729.53,255.08 699.53,225.08 699.53,110.08 674.53,85.08 U9.5@599.02,85.08 ; R23.2@306.16,330.11 332.81,368.36 ; R23.2@310.32,340.39 cw(c323.54,340.39) 314.19,349.74 ; U9.5@620.51,85.08 653.32,85.08 ; U9.5@621.56,76.83 653.32,85.08 ; U9.5@621.56,93.32 653.32,85.08 ; U9.5@626.39,79.2 cw(c640.58,65.01) 640.58,85.08 cw(c640.58,105.14) U9.5@626.39,90.96 ; 814.11,390.5 cw(c763.96,340.35) U11.4@834.88,340.35 ; 821.05,383.56 ccw(c861.38,423.89) U11.4@861.38,366.85 ; 826.06,378.55 cw(c787.86,340.35) U11.4@841.88,340.35 ; 833,371.61 ccw(c861.38,399.99) U11.4@861.38,359.85 ; U11.4@837.49,328.87 871.38,288.96 ; 838.01,366.6 cw(c811.76,340.35) U11.4@848.88,340.35 ; U11.4@838.63,326.76 818.75,385.86 ; U11.4@843.27,333.13 871.38,288.96 ; U11.4@845.24,329.41 818.75,385.86 ; U11.4@849.45,316.69 cw(c831.5,281.08) 871.38,281.08 ; U11.4@849.48,336.52 871.38,288.96 ; U11.4@851.45,332.77 818.75,385.86 ; U11.4@852.6,322.94 cw(c837.23,292.45) 871.38,292.45 ; U11.4@855.75,329.19 cw(c842.96,303.82) 871.38,303.82 ; U11.4@856.04,339.02 871.38,288.96 ; U11.4@857.2,336.77 818.75,385.86 ; U11.4@865.22,344.29 818.75,385.86 ; U11.4@866.82,341.12 871.38,288.96 ; U11.4@869.6,349.77 818.75,385.86 ; 871.38,300.52 cw(c901.21,300.52) U11.4@880.12,321.62 ; U11.4@873.35,355.75 818.75,385.86 ; U11.4@873.85,341.26 871.38,288.96 ; U11.4@876.43,362.17 818.75,385.86 ; U11.4@880.88,340.45 871.38,288.96 ; U11.4@887.82,338.67 871.38,288.96 ; 818.75,385.86 U11.4@861.38,340.35 871.38,288.96
NetR24_1: pad.1@-2267.48,3372.09 R24.1 U12.7 | length 333.2
  Top Layer w20: -2281.14,3380.74 ccw(c-2267.48,3394.4) pad.1@-2267.48,3375.09 ; pad.1@-2272.48,3372.09 -2274.76,3409.13 pad.1@-2267.48,3372.09 ; pad.1@-2272.48,3372.09 -2288.88,3405.38 pad.1@-2267.48,3372.09 ; pad.1@-2272.48,3372.09 -2260.29,3407.15 pad.1@-2267.48,3372.09 ; pad.1@-2272.48,3372.09 -2302.48,3402.09 pad.1@-2267.48,3372.09 ; pad.1@-2272.48,3372.09 pad.1@-2267.48,3372.09
NetR25_1: pad.1@-2272.48,3037.09 R25.1 U13.7 | length 502.1
  Top Layer w15: pad.1@-2282.48,3037.09 pad.1@-2272.48,3037.09
  Top Layer w20: -2294.67,3024.89 cw(c-2272.48,3002.7) pad.1@-2272.48,3034.09 ; pad.1@-2282.48,3037.09 R25.1@-2317.48,2989.13 pad.1@-2272.48,3037.09 ; pad.1@-2282.48,3037.09 -2304.71,2982.04 pad.1@-2272.48,3037.09 ; pad.1@-2282.48,3037.09 -2328.13,2999.13 pad.1@-2272.48,3037.09 ; pad.1@-2282.48,3037.09 -2312.48,3007.09 pad.1@-2272.48,3037.09
NetR34_1: R34.1 U16.4 | length 513.3
  Top Layer w7: R34.1@-2489.69,1140 -2382.28,1140 U16.4@-2377.4,1144.88 -2412.3,1140 ; R34.1@-2488.91,1132.23 -2450.38,1140 ; R34.1@-2488.91,1147.77 -2450.38,1140 ; R34.1@-2486.9,1125.46 -2450.38,1140 ; R34.1@-2486.9,1154.54 -2450.38,1140 ; R34.1@-2484.16,1134.48 cw(c-2470.84,1121.15) -2470.84,1140 cw(c-2470.84,1158.85) R34.1@-2484.16,1145.52 ; R34.1@-2479.21,1129.53 cw(c-2453.94,1104.25) -2453.94,1140 cw(c-2453.94,1175.75) R34.1@-2479.21,1150.47 ; -2409.44,1140 cw(c-2409.44,1103.98) U16.4@-2383.97,1129.45 ; -2392.54,1140 cw(c-2392.54,1120.88) U16.4@-2379.02,1134.4 ; -2390.24,1140 ccw(c-2390.24,1148.87) U16.4@-2383.97,1142.6 ; U16.4@-2379.89,1153.84 -2412.3,1140 ; U16.4@-2377.34,1135.59 -2412.3,1140
NetR35_1: R35.1 R36.2 U16.3 | length 1174.3
  Top Layer w7: R36.2@-2504.23,1303.77 -2489.69,1340.29 ; R35.1@-2504.23,1376.23 -2489.69,1339.71 ; R35.1@-2500.16,1368.55 cw(c-2525.43,1343.27) -2489.69,1343.27 cw(c-2453.94,1343.27) R35.1@-2479.21,1368.55 ; R36.2@-2500.16,1311.45 ccw(c-2525.43,1336.73) -2489.69,1336.73 ccw(c-2453.94,1336.73) R36.2@-2479.21,1311.45 ; R36.2@-2497.45,1301.76 -2489.69,1340.29 ; R35.1@-2497.45,1378.24 -2489.69,1339.71 ; R36.2@-2495.21,1306.5 ccw(c-2508.53,1319.83) -2489.69,1319.83 ccw(c-2470.84,1319.83) R36.2@-2484.16,1306.5 ; R35.1@-2495.21,1373.5 cw(c-2508.53,1360.17) -2489.69,1360.17 cw(c-2470.84,1360.17) R35.1@-2484.16,1373.5 ; R36.2@-2489.68,1300.98 -2489.69,1340.29 ; R35.1@-2489.69,1379.02 -2489.69,1339.71 ; R35.1@-2489.69,1380 R36.2@-2489.68,1300 -2422.28,1300 U16.3@-2377.4,1255.12 ; R36.2@-2488.91,1292.23 -2450.38,1300 ; R36.2@-2488.91,1307.77 -2450.38,1300 ; R36.2@-2486.9,1285.46 -2450.38,1300 ; R36.2@-2486.9,1314.54 -2450.38,1300 ; R36.2@-2484.16,1294.48 cw(c-2470.84,1281.15) -2470.84,1300 cw(c-2470.84,1318.85) R36.2@-2484.16,1305.52 ; R36.2@-2481.92,1301.76 -2489.69,1340.29 ; R35.1@-2481.92,1378.24 -2489.69,1339.71 ; R36.2@-2479.21,1289.53 cw(c-2453.94,1264.25) -2453.94,1300 cw(c-2453.94,1335.75) R36.2@-2479.21,1310.47 ; R36.2@-2475.14,1303.77 -2489.69,1340.29 ; R35.1@-2475.14,1376.23 -2489.69,1339.71 ; -2408.39,1286.11 ccw(c-2377.4,1317.1) U16.3@-2377.4,1273.27 ; -2396.44,1274.16 ccw(c-2377.4,1293.2) U16.3@-2377.4,1266.27 ; U16.3@-2383.64,1257.09 -2405.05,1282.76 ; U16.3@-2377.4,1263.98 -2405.05,1282.76 ; U16.3@-2373.3,1272.32 -2405.05,1282.76
NetR41_6: pad.1@-1632.5,1622.5 R41.6 U17.3 | length 911
  Top Layer w7: U17.3@-1795,1600 -1660,1600 ; U17.3@-1777.8,1600.08 -1737.11,1600 ; U17.3@-1776.78,1590.95 -1737.11,1600 ; U17.3@-1776.74,1609.2 -1737.11,1600 ; U17.3@-1774.61,1584.21 -1737.11,1600 ; U17.3@-1774.55,1615.93 -1737.11,1600 ; U17.3@-1771.3,1593.58 cw(c-1755.81,1578.09) -1755.81,1600 ; U17.3@-1771.3,1606.57 ccw(c-1755.43,1622.44) -1755.43,1600 ; U17.3@-1766.35,1588.63 cw(c-1738.91,1561.2) -1738.91,1600 ; U17.3@-1766.35,1611.52 ccw(c-1738.53,1639.34) -1738.53,1600 ; -1655.22,1604.78 cw(c-1632.5,1582.05) pad.1@-1632.5,1614.19 ; -1643.27,1616.73 cw(c-1632.5,1605.95) pad.1@-1632.5,1621.19 ; -1643.15,1616.85 ccw(c-1648.8,1622.5) pad.1@-1640.81,1622.5 ; pad.1@-1638.48,1628.27 -1660,1600 ; pad.1@-1635,1625 -1660,1600 ; pad.1@-1632.5,1622.5 -1660,1600 ; pad.1@-1628.03,1615.5 -1660,1600
  Bottom Layer w7: pad.1@-1632.5,1622.5 -1561.36,1622.5 R41.6@-1557.48,1626.38 ; pad.1@-1631.45,1614.26 -1599.69,1622.5 pad.1@-1631.45,1630.74 ; pad.1@-1626.62,1616.62 cw(c-1612.44,1602.44) -1612.44,1622.5 cw(c-1612.44,1642.56) pad.1@-1626.62,1628.38 ; -1592.53,1622.5 ccw(c-1592.53,1651.43) R41.6@-1572.08,1630.97 ; R41.6@-1568.94,1632.71 -1598.73,1622.5 ; R41.6@-1567.48,1626.38 -1598.73,1622.5 ; R41.6@-1567.35,1619.88 -1598.73,1622.5
NetR43_2: R43.2 U17.6 | length 707.9
  Top Layer w7: R43.2@-1929.52,1367.81 -1890.15,1363.07 ; R43.2@-1928.32,1352.31 -1890.15,1363.07 ; R43.2@-1928.06,1374.72 -1890.15,1363.07 ; R43.2@-1925.8,1345.71 -1890.15,1363.07 ; R43.2@-1924.16,1355.46 cw(c-1905.8,1337.1) -1905.8,1363.07 ; R43.2@-1919.21,1350.51 cw(c-1888.9,1320.2) -1888.9,1363.07 ; R43.2@-1919.21,1371.45 ccw(c-1898.98,1391.69) -1898.98,1363.07 ; U17.6@-1828.61,1351.63 ccw(c-1856.24,1324) -1856.24,1363.07 ccw(c-1856.24,1402.14) U17.6@-1828.61,1374.52 ; U17.6@-1823.66,1356.58 ccw(c-1839.34,1340.9) -1839.34,1363.07 ccw(c-1839.34,1385.25) U17.6@-1823.66,1369.57 ; U17.6@-1820.38,1347.21 -1857.85,1363.07 ; U17.6@-1820.38,1378.93 -1857.85,1363.07 ; U17.6@-1818.2,1353.94 -1857.85,1363.07 ; U17.6@-1818.2,1372.2 -1857.85,1363.07 ; U17.6@-1817.17,1363.07 -1857.85,1363.07 ; U17.6@-1797.48,1363.07 -1926.61,1363.07 R43.2@-1929.68,1360 -1890.15,1363.07
NetR54_1: R54.1 U18.4 | length 578.7
  Top Layer w12: U18.4@-1481.66,412.13 -1474.88,363.8 ; U18.4@-1479.69,407.79 cw(c-1491.29,396.19) -1474.88,396.19 cw(c-1458.48,396.19) U18.4@-1470.08,407.79 ; U18.4@-1468.1,412.13 -1474.88,363.8 ; R54.1@-1452.54,232.38 -1440.31,285.29 ; R54.1@-1449.02,239.69 ccw(c-1470.03,260.7) -1440.31,260.7 ccw(c-1410.6,260.7) R54.1@-1431.61,239.69 ; R54.1@-1440.31,230 -1440.31,290.31 -1474.88,324.88 U18.4@-1474.88,412.6 -1474.88,363.8 ; R54.1@-1440.31,230.98 -1440.31,285.29 ; R54.1@-1428.09,232.38 -1440.31,285.29
NetR55_1: R55.1 R56.2 U18.3 | length 1304.7
  Top Layer w7: R56.2@-1614.86,233.77 -1600.31,270.29 ; R55.1@-1614.86,306.23 -1600.31,269.71 ; R55.1@-1613.63,317.46 -1585.12,359.2 ; R56.2@-1610.79,241.45 ccw(c-1636.06,266.73) -1600.31,266.73 ccw(c-1564.57,266.73) R56.2@-1589.84,241.45 ; R55.1@-1610.79,298.55 cw(c-1636.06,273.27) -1600.31,273.27 cw(c-1564.57,273.27) R55.1@-1589.84,298.55 ; R55.1@-1610.79,321.45 ccw(c-1672.75,383.42) -1585.12,383.42 ; R56.2@-1608.08,231.76 -1600.31,270.29 ; R55.1@-1608.08,308.24 -1600.31,269.71 ; R55.1@-1607.56,313.9 -1585.12,359.2 ; R56.2@-1605.84,236.5 ccw(c-1619.16,249.83) -1600.31,249.83 ccw(c-1581.47,249.83) R56.2@-1594.79,236.5 ; R55.1@-1605.84,303.5 cw(c-1619.16,290.17) -1600.31,290.17 cw(c-1581.47,290.17) R55.1@-1594.79,303.5 ; R55.1@-1605.84,316.5 ccw(c-1655.85,366.52) -1585.12,366.52 ; R55.1@-1600.89,311.55 ccw(c-1638.95,349.62) -1585.12,349.62 ; R56.2@-1600.32,230 R55.1@-1600.31,310 -1585.12,325.2 U18.3@-1585.12,412.6 ; R56.2@-1600.32,230.98 -1600.31,270.29 ; R55.1@-1600.31,309.02 -1600.31,269.71 ; R55.1@-1600.31,310.98 -1585.12,359.2 ; R55.1@-1595.94,306.61 ccw(c-1622.05,332.72) -1585.12,332.72 ; U18.3@-1594.33,411.32 -1585.12,378.8 U18.3@-1575.91,411.32 ; R55.1@-1592.71,309.22 -1585.12,359.2 ; R56.2@-1592.55,231.76 -1600.31,270.29 ; R55.1@-1592.55,308.24 -1600.31,269.71 ; U18.3@-1591.69,406.03 cw(c-1607.56,390.16) -1585.12,390.16 cw(c-1562.68,390.16) U18.3@-1578.55,406.03 ; R56.2@-1585.77,233.77 -1600.31,270.29 ; R55.1@-1585.77,306.23 -1600.31,269.71 ; R55.1@-1585.69,308.65 -1585.12,359.2
NRST: C62.1 FLASH.2 pad.1@-1597.5,1662.5 Q3.3 R41.5 U17.1 | length 7093
  Top Layer w7: U17.1@-1785,1755 -1685,1755 -1595,1665 -1595,1530 -1545,1480 -970,1480 ; U17.1@-1777.8,1756.38 -1737.1,1755 ; U17.1@-1777.07,1747.22 -1737.1,1755 ; U17.1@-1776.45,1765.46 -1737.1,1755 ; U17.1@-1775.12,1740.42 -1737.1,1755 ; U17.1@-1774.04,1772.12 -1737.1,1755 ; U17.1@-1771.3,1762.87 ccw(c-1752.29,1781.88) -1752.29,1755 ; U17.1@-1766.35,1744.93 cw(c-1742.05,1720.63) -1742.05,1755 ; U17.1@-1766.35,1767.82 ccw(c-1735.39,1798.78) -1735.39,1755 ; -1615.22,1685.22 cw(c-1637.95,1662.5) pad.1@-1605.81,1662.5 ; pad.1@-1605.64,1660.84 -1595,1629.51 ; pad.1@-1604.45,1657.94 -1621.55,1691.55 ; pad.1@-1603.38,1656.62 cw(c-1623.6,1636.4) -1595,1636.4 ; -1603.27,1673.27 cw(c-1614.05,1662.5) pad.1@-1598.81,1662.5 ; -1603.15,1673.15 ccw(c-1597.5,1678.8) pad.1@-1597.5,1670.81 ; -1595,1648.47 cw(c-1583.47,1648.47) pad.1@-1591.62,1656.62 ; pad.1@-1591.72,1668.47 -1621.55,1691.55 ; pad.1@-1589.2,1662.08 -1595,1629.51 ; FLASH.2@-296.09,1430.83 -234.91,1404.91 ; FLASH.2@-292.94,1437.27 -234.91,1404.91 ; FLASH.2@-289.16,1443.27 -234.91,1404.91 ; FLASH.2@-284.8,1448.79 -234.91,1404.91 ; FLASH.2@-280.87,1456.38 -280.87,1450.87 -225,1395 -225,1200 -260,1165 -325,1165 -440,1050 -1010,1050 -1080,1120 -1080,1175 -1025,1230 -840,1230 -820,1250 -820,1330 -830,1330 -835,1335 -950,1335 -970,1355 -970,1480 ; FLASH.2@-279.9,1453.8 -234.91,1404.91 ; FLASH.2@-276.93,1424.45 cw(c-276.93,1370.16) -238.55,1408.55 ; FLASH.2@-276.93,1431.44 cw(c-276.93,1394.06) -250.5,1420.5 ; FLASH.2@-273.81,1458.77 -234.91,1404.91 ; FLASH.2@-267.92,1462.57 -234.91,1404.91 ; FLASH.2@-261.63,1465.74 -234.91,1404.91 ; FLASH.2@-259.29,1453.12 ccw(c-221.06,1446.05) -248.55,1418.55 ; FLASH.2@-255,1468.24 -234.91,1404.91 ; FLASH.2@-252.41,1451.85 ccw(c-205.17,1443.11) -239.14,1409.14 ; FLASH.2@-248.06,1470.04 -234.91,1404.91 ; FLASH.2@-245.53,1450.57 ccw(c-189.28,1440.18) -229.73,1399.73 ; -1621.55,1691.55 pad.1@-1597.5,1662.5 -1595,1629.51 ; Q3.3@-1019.38,1578.48 -1009.21,1545.22 ; Q3.3@-1019.38,1578.48 -1009.21,1545.22 ; Q3.3@-1019.38,1578.48 -1009.21,1545.22 ; Q3.3@-1019.38,1578.48 -1009.21,1545.22 ; Q3.3@-1019.38,1578.48 -1009.21,1545.22 ; Q3.3@-1019.38,1578.48 -1009.21,1545.22 ; Q3.3@-1019.38,1578.48 -1009.21,1545.22 ; Q3.3@-1019.38,1578.48 -1009.21,1545.22 ; Q3.3@-1019.38,1578.48 -1009.21,1545.22 ; Q3.3@-1019.38,1578.48 -1009.21,1545.22 ; Q3.3@-1019.38,1578.48 -1009.21,1545.22 ; Q3.3@-1019.38,1578.48 -1009.21,1545.22 ; Q3.3@-1019.38,1578.48 -1009.21,1545.22 ; Q3.3@-1019.38,1578.48 -1009.21,1545.22 ; Q3.3@-1019.38,1578.48 -1009.21,1545.22 ; Q3.3@-1016.48,1572.73 cw(c-1034.03,1555.18) -1009.21,1555.18 ; Q3.3@-1016.48,1572.73 cw(c-1034.03,1555.18) -1009.21,1555.18 ; Q3.3@-1016.48,1572.73 cw(c-1034.03,1555.18) -1009.21,1555.18 ; -1009.21,1545.22 Q3.3@-1009.21,1580 ; -1009.21,1545.22 Q3.3@-999.05,1578.48 ; -1009.21,1545.22 Q3.3@-1009.21,1580 ; -1009.21,1545.22 Q3.3@-999.05,1578.48 ; -1009.21,1545.22 Q3.3@-1009.21,1580 ; -1009.21,1545.22 Q3.3@-999.05,1578.48 ; -1009.21,1545.22 Q3.3@-1009.21,1580 ; -1009.21,1545.22 Q3.3@-999.05,1578.48 ; -1009.21,1545.22 Q3.3@-999.05,1578.48 ; -1009.21,1545.22 Q3.3@-999.05,1578.48 ; -1009.21,1545.22 Q3.3@-999.05,1578.48 ; -1009.21,1545.22 Q3.3@-1009.21,1580 ; -1009.21,1545.22 Q3.3@-999.05,1578.48 ; -1009.21,1545.22 Q3.3@-1009.21,1580 ; -1009.21,1545.22 Q3.3@-999.05,1578.48 ; -1009.21,1545.22 Q3.3@-1009.21,1580 ; -1009.21,1545.22 Q3.3@-999.05,1578.48 ; -1009.21,1545.22 Q3.3@-1009.21,1580 ; -1009.21,1545.22 Q3.3@-999.05,1578.48 ; -1009.21,1545.22 Q3.3@-1009.21,1580 ; -1009.21,1545.22 Q3.3@-999.05,1578.48 ; -1009.21,1545.22 Q3.3@-999.05,1578.48 ; -1009.21,1545.22 Q3.3@-1009.21,1580 ; -1009.21,1545.22 Q3.3@-999.05,1578.48 ; -1009.21,1545.22 Q3.3@-999.05,1578.48 ; -1009.21,1555.18 cw(c-984.4,1555.18) Q3.3@-1001.94,1572.73 ; -1009.21,1555.18 cw(c-984.4,1555.18) Q3.3@-1001.94,1572.73 ; -1009.21,1555.18 cw(c-984.4,1555.18) Q3.3@-1001.94,1572.73 ; Q3.3@-1009.21,1580 -1009.21,1519.21 -970,1480
  Bottom Layer w7: pad.1@-1598.87,1654.3 R41.5@-1566.79,1653.14 ; pad.1@-1598.29,1670.77 R41.5@-1566.79,1669.61 ; pad.1@-1596.17,1670.7 R41.5@-1564.66,1661.38 ; pad.1@-1596.13,1670.7 R41.5@-1565.67,1661.38 ; pad.1@-1594.57,1654.72 R41.5@-1566.79,1669.61 ; pad.1@-1594.07,1670.07 R41.5@-1566.79,1653.14 ; pad.1@-1591.62,1656.62 cw(c-1580.14,1645.14) -1580.14,1661.38 ; pad.1@-1591.62,1668.38 ccw(c-1574.73,1685.27) R41.5@-1574.73,1661.38 ; R41.5@-1571.55,1655.5 ccw(c-1585.73,1641.31) -1585.73,1661.38 ccw(c-1585.73,1681.44) R41.5@-1571.55,1667.25 ; R41.5@-1565.72,1662.43 -1557.48,1694.19 R41.5@-1549.24,1662.43 ; C62.1@-1565.12,1738.93 -1557.48,1698.56 ; R41.5@-1563.36,1667.25 ccw(c-1577.54,1681.44) -1557.48,1681.44 ccw(c-1537.41,1681.44) R41.5@-1551.6,1667.25 ; C62.1@-1560.79,1728.55 cw(c-1568.77,1720.56) -1557.48,1720.56 ; C62.1@-1558.1,1739.64 -1557.48,1698.56 ; -1557.48,1685.97 cw(c-1497.27,1685.97) C62.1@-1539.84,1728.55 ; -1557.48,1702.87 cw(c-1514.17,1702.87) C62.1@-1544.79,1733.5 ; -1557.48,1719.77 cw(c-1531.07,1719.77) C62.1@-1549.74,1738.45 ; C62.1@-1550.32,1739.02 -1557.48,1698.56 ; C62.1@-1550.32,1740 -1557.48,1732.84 R41.5@-1557.48,1661.38 pad.1@-1596.38,1661.38 ; C62.1@-1542.79,1736.93 -1557.48,1698.56 ; C62.1@-1536.44,1733.85 -1557.48,1698.56 ; pad.1@-1597.5,1662.5 R41.5@-1564.66,1661.38 ; pad.1@-1597.5,1662.5 R41.5@-1566.79,1669.61 ; pad.1@-1597.5,1662.5 R41.5@-1565.67,1661.38 ; pad.1@-1597.5,1662.5 R41.5@-1566.79,1653.14 ; pad.1@-1596.38,1661.38 R41.5@-1565.67,1661.38 ; pad.1@-1596.38,1661.38 R41.5@-1566.79,1669.61 ; pad.1@-1596.38,1661.38 R41.5@-1566.79,1653.14 ; R41.5@-1565.67,1661.38 -1596.71,1654.23 R41.5@-1564.66,1661.38
O10V: C4.1 D2.2 OLED1.2 R13.1 | length 3017.2
  Top Layer w6: 851.1,1385.67 cw(c889.33,1347.44) D2.2@889.33,1401.5 ; 858.71,1393.27 ccw(c831.23,1420.75) D2.2@870.09,1420.75 ; 861.34,1395.91 cw(c889.33,1367.93) D2.2@889.33,1407.5 ; D2.2@868.95,1403.52 ccw(c851.72,1420.75) D2.2@876.09,1420.75 ; D2.2@871.59,1406.15 cw(c889.33,1388.41) D2.2@889.33,1413.5 ; D2.2@873.75,1432.05 854.36,1388.93 ; D2.2@879.13,1429.2 854.36,1388.93 ; D2.2@883.83,1425.35 902.52,1460.99 ; D2.2@884.06,1425.72 854.36,1388.93 ; D2.2@888.91,1434.36 ccw(c856.06,1467.21) 902.52,1467.21 ccw(c948.98,1467.21) D2.2@916.13,1434.36 ; D2.2@889.33,1420.75 854.36,1388.93 ; D2.2@889.46,1422.93 902.52,1460.99 ; D2.2@893.15,1430.11 ccw(c870.55,1452.72) 902.52,1452.72 ccw(c934.49,1452.72) D2.2@911.88,1430.11 ; D2.2@893.78,1415.03 854.36,1388.93 ; D2.2@895.3,1421.4 902.52,1460.99 ; D2.2@896.78,1409.8 854.36,1388.93 ; D2.2@899.11,1404.18 854.36,1388.93 ; D2.2@909.73,1421.4 902.52,1460.99 ; D2.2@915.58,1422.93 902.52,1460.99 ; D2.2@921.21,1425.35 902.52,1460.99 ; 950.95,1535.52 ccw(c914.07,1572.4) R13.1@966.23,1572.4 ; 961.19,1545.76 ccw(c934.55,1572.4) R13.1@972.23,1572.4 ; 966.16,1550.72 cw(c981.54,1535.35) R13.1@981.54,1557.09 ; R13.1@968.11,1579.76 954.57,1539.14 ; OLED1.2@968.75,760.41 972.52,786.03 ; OLED1.2@970.18,763.6 ccw(c964.52,769.26) 972.52,769.26 ; R13.1@971.44,1556 ccw(c955.04,1572.4) R13.1@978.23,1572.4 ; OLED1.2@972.52,732.09 972.52,822.09 907.52,887.09 907.52,1042.09 847.52,1102.09 847.52,1382.09 886.18,1420.75 D2.2@902.52,1420.75 902.52,1487.09 982.52,1567.09 R13.1@982.52,1572.4 1007.2,1572.4 ; 972.52,774.59 ccw(c988.05,774.59) OLED1.2@977.07,763.6 ; OLED1.2@973.62,760.16 972.52,786.03 ; R13.1@973.71,1577.44 954.57,1539.14 ; OLED1.2@978.45,760.82 972.52,786.03 ; R13.1@978.89,1574.38 954.57,1539.14 ; R13.1@981.54,1572.4 954.57,1539.14 ; R13.1@983.5,1572.4 1007.2,1572.4 ; R13.1@983.73,1569.1 1007.2,1572.4 ; R13.1@983.73,1575.7 1007.2,1572.4 ; R13.1@984.02,1570.22 954.57,1539.14 ; R13.1@985.33,1563.28 1007.2,1572.4 ; R13.1@985.33,1581.53 1007.2,1572.4 ; R13.1@988.09,1565.79 954.57,1539.14 ; R13.1@988.45,1557.91 1007.2,1572.4 ; R13.1@988.45,1586.89 1007.2,1572.4 ; R13.1@991.51,1560.79 954.57,1539.14 ; R13.1@997.46,1566.11 cw(c1007.2,1561.71) 1007.2,1572.4 ; R13.1@997.46,1578.7 ccw(c1007.2,1583.1) 1007.2,1572.4 ; 1164.68,1539.93 cw(c1144.44,1519.69) C4.1@1172.43,1513.71 ; C4.1@1167.13,1506.6 1162.52,1542.09 ; 1172.49,1532.12 cw(c1157.31,1516.94) C4.1@1178.3,1512.46 ; C4.1@1173.07,1507.89 1162.52,1542.09 ; C4.1@1174.69,1529.91 ccw(c1181.54,1536.75) C4.1@1181.54,1527.08 ; C4.1@1178.66,1510.15 1162.52,1542.09 ; C4.1@1181.54,1511.77 1162.52,1542.09 ; C4.1@1182.52,1522.09 1162.52,1542.09 ; C4.1@1184.25,1513.66 1162.52,1542.09 ; C4.1@1188.71,1517.7 1162.52,1542.09 ; C4.1@1192.46,1522.49 1162.52,1542.09 ; 1007.2,1572.4 1037.52,1542.09 1162.52,1542.09